# Altium PCB SPARKy watch PCB blank.PcbDoc (part 2 of 2)
Units mm, origin at the board's own origin, x right, y up, seen from the top; angles counter-clockwise.
Board outline 67 x 34.75 mm, 2 copper layers (Component Side, Bottom Layer), stack 0.325 mm thick; 94 components, 71 nets, 348 pads, 22 vias.
Unrouted connection lines stored in the file: 142.
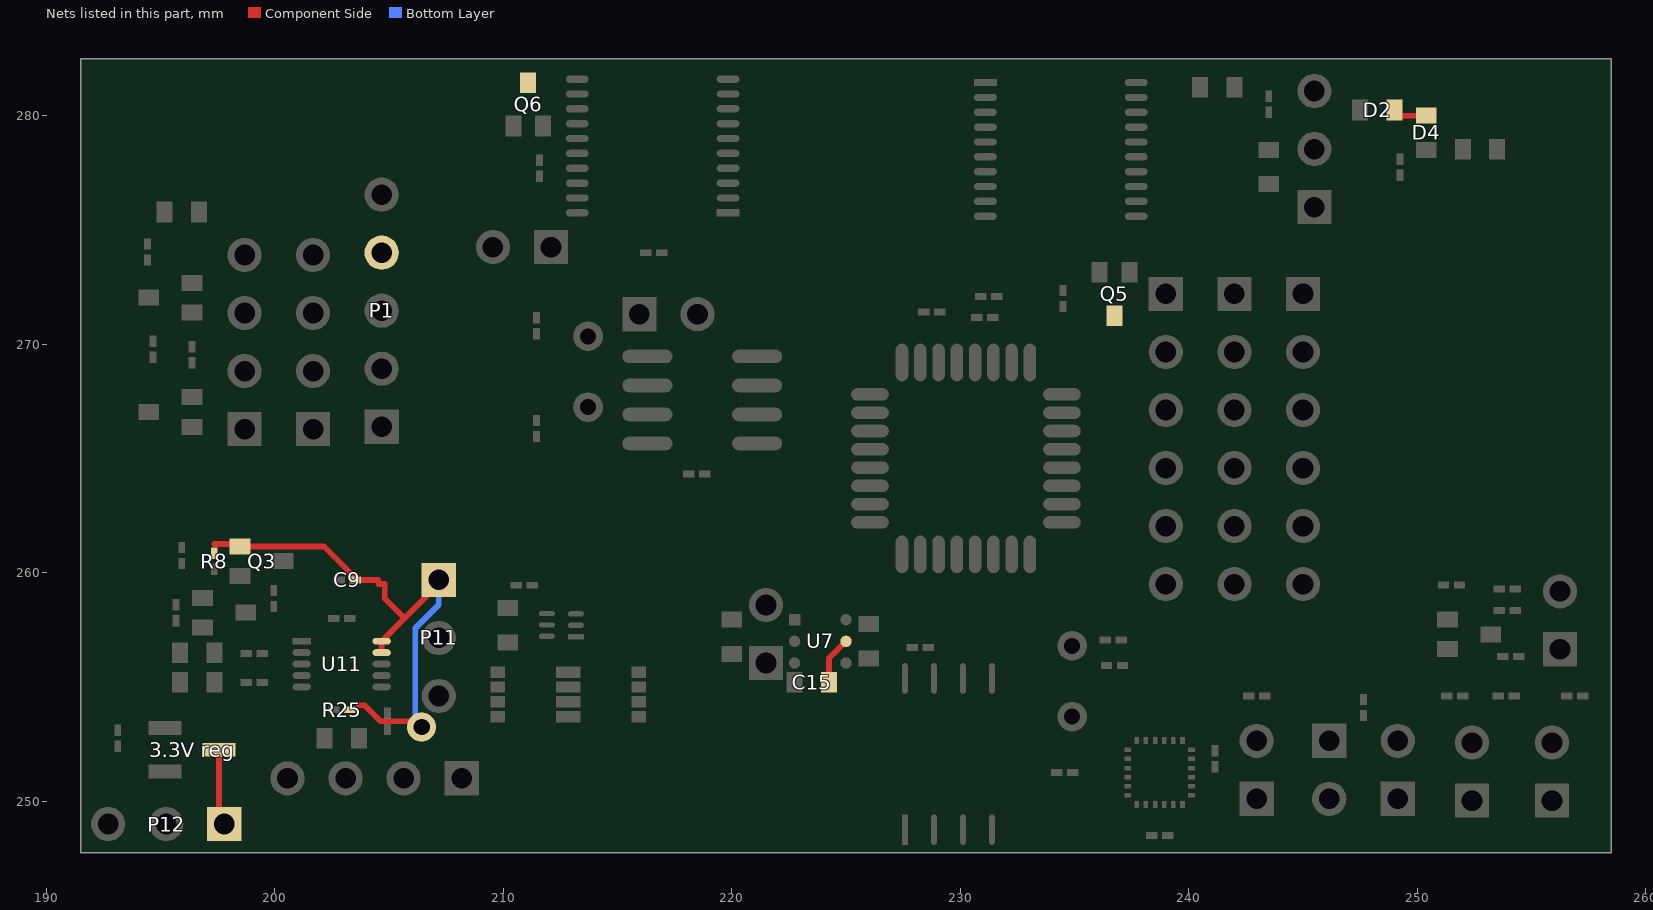
[diagram p2: the nets of this part, all layers, seen from the top]

## Via types
v1: diameter 1.27, hole 0.711, Component Side to Bottom Layer, 13 vias
v2: diameter 0.25, hole 0.2, Component Side to Bottom Layer, 9 vias

## Nets (pads, with @x,y where several pads share a name; then routed paths per layer and width w, separated by ;. In a path a pad name is that pad's centre, name@x,y a point inside that pad or via, vN(x,y) a via of type N, cw(c..) or ccw(c..) an arc to the next point about the centre after c; other vN are vias at no path point) (continued)
"V BAT": "3.3V reg.1" C9.2 C15.2 D2.2 D4.2 P1.4 P11.1 P12.1@197.787,249 Q3.1 Q5.3 Q6.3@211.089,281.45 R8.2 R25.1 U7.5 U11.9 U11.10 | length 31.3
  Component Side w0.254: 197.352,261.25 198.377,261.25 Q3.1@198.477,261.15 202.154,261.15 203.622,259.682 204.527,259.682 ; 197.552,252.25 197.552,249.235 P12.1@197.787,249 ; 203.677,254.196 203.931,254.196 204.627,253.5 206.177,253.5 v1(206.427,253.25) ; 204.527,259.5 204.809,259.5 204.809,258.868 205.677,258 ; U11.9@204.677,256.5 U11.10@204.677,257 205.677,258 ; P11.1@207.177,259.682 207.177,259.5 205.677,258 ; C15.2@224.25,255.196 224.25,256.246 U7.5@224.999,256.995 ; D2.2@249,280.25 249.25,280 D4.2@250.399,280
  Bottom Layer w0.254: v1(206.427,253.25) 206.427,253.298 206.15,253.575 206.15,257.568 207.177,258.595 P11.1@207.177,259.682
pads on no net: P10.2 P10.3 Q6.2@251.325,256.65 R100.1 U1.10 U1.23 U2.2 U2.3 U2.4 U2.5 U2.6 U2.7 U2.14 U2.15 U2.16 U2.17 U2.19 U2.21 U5.1 U5.3 U5.8 U5.10 U5.13 U5.18 U5.19 U6.3 U6.8 U6.15 U6.18 U8.1
copper on no net: | length 247.4
  Component Side w0.2: 174.75,302.793 175,303.043 175,320.75 177.75,320.75 ; 174.75,305.793 172,305.793 172,317.75 174.75,317.75 ; 175,325 175,317.75 177.75,317.75 177.75,320.75 ; 178,305.793 178,302.793 180.75,302.793 ; 183.75,305.793 183.75,302.793 ; 177.75,320.75 180.75,320.75 ; 180.75,302.793 180.75,320.75 ; 180.75,302.793 183.75,302.793 ; 180.75,302.793 180.75,320.75 ; 180.75,320.75 184,320.75 184,303.043 183.75,302.793
  Bottom Layer w0.2: 174.75,302.793 174.75,320.75 178,320.75 178,317.75 174.75,317.75 ; 174.75,305.793 172,305.793 172,317.75 174.75,317.75 ; 174.75,325 174.75,317.75 ; 177.75,320.75 180.75,320.75 ; 178,305.793 178,302.793 180.75,302.793 ; 183.75,305.793 183.75,302.793 ; 180.75,302.793 180.75,320.75 ; 180.75,302.793 183.75,302.793 ; 180.75,302.793 180.75,320.75 ; 180.75,320.75 184,320.75 184,303.043 183.75,302.793
  other v2: 238.225,250.733 238.725,250.733 239.325,250.733 238.225,251.233 238.725,251.233 239.325,251.233 238.225,251.733 238.725,251.733 239.325,251.733

## Keep-outs
Keep-Out Layer:
  lines w0.1: 171.75,306.043 171.75,317.5 184,317.5 184,306.043 171.75,306.043 ; 183.75,224.863 183.75,294.863 293.75,294.863 293.75,224.863 183.75,224.863

## Other copper
Component Side:
  text "100XXXX ISSUE 1" at 173.75,335.25 h2.5
  text "1" at 172.75,303.543 h2.5
  text "4" at 405.662,105.85 h3
  text "TOP ELEC" at 434.35,105.85 h3
Bottom Layer:
  text "4" at 181.75,303.5 h2.5
  text "11" at 404.384,105.85 h3
  text "BOTTOM ELEC" at 434.35,105.85 h3

## Silkscreen, mask and mechanical layers (free items; w line width, h text height)
Top Paste:
  text "2" at 405.662,105.85 h3
  text "TOP SOLDER PASTE" at 434.35,105.85 h3
Bottom Paste:
  text "13" at 404.384,105.85 h3
  text "BOTTOM SOLDER PASTE" at 434.35,105.85 h3
Top Solder:
  rectangle: 192.75,340.25 205.25,343.75
  text "3" at 405.662,105.85 h3
  text "TOP SOLDER RESIST" at 434.35,105.85 h3
Solder Side:
  rectangle: 177.25,343.5 189.75,347
  text "12" at 404.384,105.85 h3
  text "BOTTOM SOLDER RESIST" at 434.35,105.85 h3
Mechanical 5:
  drawing of 6820 lines, arcs and shapes, not listed
  text "1" at 138.126,384.5 h4
  text "2" at 186.222,384.5 h4
  text "3" at 234.722,384.5 h4
  text "4" at 283.222,384.5 h4
  text "5" at 331.722,384.5 h4
  text "6" at 380.222,384.5 h4
  text "7" at 428.722,384.5 h4
  text "8" at 477.222,384.5 h4
  text "DO NOT SCALE - IF IN DOUBT ASK" at 265.25,376.5 h6
  text "A" at 503.897,368.98 h4
  text "A" at 101.359,364.134 h4
  text "B" at 503.897,320.48 h4
  text "B" at 101.359,315.634 h4
  text "C" at 503.897,271.98 h4
  text "C" at 101.359,267.134 h4
  text "D" at 503.897,223.48 h4
  text "D" at 101.359,218.634 h4
  text "E" at 503.864,174.921 h4
  text "E" at 101.359,170.134 h4
  text "NO. OF LAYERS:" at 169.088,149.85 h3
  text "GENERAL NOTES" at 237.338,149.85 h3
  text "DR'N:" at 469.588,149.85 h3
  text "THE INFORMATION CONTAINED" at 111.338,148.6 h4.5
  text "PROJECTION" at 447.338,147.85 h3
  text "MATERIAL:" at 169.088,145.85 h3
  text "FR4 TO IPC4101/99 OR ABOVE WITH" at 184.838,145.85 h3
  text "1. THIS PCB SHALL BE MANUFACTURED IN ACCORDANCE WITH IPC-6012 CLASS 2." at 237.338,145.85 h3
  text "DATE:" at 469.588,145.85 h3
  text "HEREIN SHALL NOT BE REPRODUCED" at 106.088,143.85 h4.5
  text "A  FLIR  COMPANY" at 417.778,142.337 h3
  text "MINIMUM Tg RATING OF 170" at 184.838,141.85 h3
  text "2. MANUFACTURER LOGO AND UL MARK (94V-0) TO BE ADDED TO SOLDER RESIST ARTWORK IN AREA SHOWN." at 237.338,141.85 h3
  text "CK'D:" at 469.588,141.85 h3
  text "WITHOUT THE PRIOR" at 119.338,139.1 h4.5
  text "BOARD THICKNESS:" at 169.088,137.85 h3
  text "OVER PLATING" at 206.588,137.85 h3
  text "3. ALL PCB'S TO BE ELECTRICALY TESTED TO IPC-9252." at 237.338,137.85 h3
  text "DATE:" at 469.588,137.85 h3
  text "C" at 398.781,136.359 h4
  text "2014 RAYMARINE LTD" at 404.781,136.359 h4
  text "WRITTEN PERMISSION OF" at 116.338,134.6 h4.5
  text "SURFACE FINISH:" at 169.088,133.85 h3
  text "ENIG TO IPC-4552 CLASS 2" at 194.088,133.85 h3
  text "4. PCB NUMBER, ISSUE AND TITLE TO BE INCLUDED IN COPPER ON LAYER 1." at 237.338,133.85 h3
  text "TEXT TO BE IN UPPER CASE AND" at 340.588,133.85 h3
  text "APPR:" at 469.588,133.85 h3
  text "RAYMARINE LTD" at 123.338,130.1 h4.5
  text "SOLDER RESIST:" at 169.088,129.85 h3
  text "GREEN PHOTO IMAGEABLE TO" at 194.088,129.85 h3
  text "BETWEEN 1.5mm AND 4.0mm IN HEIGHT." at 240.588,129.85 h3
  text "DIMENSIONS IN MM" at 407.088,129.85 h3
  text "SCALE:" at 447.088,129.85 h3
  text "1:1" at 460.338,129.85 h3
  text "PROJECT:" at 469.588,129.85 h3
  text "F" at 101.359,127.798 h4
  text "TOLERANCES UNLESS OTHERWISE STATED" at 107.338,125.85 h3
  text "IPC-SM-840 CLASS T" at 194.088,125.85 h3
  text "5. PANEL WASTE AREA TO INCLUDE COPPER HATCHING." at 237.338,125.85 h3
  text "TITLE:" at 397.088,125.85 h3
  text "F" at 504.122,123.722 h4
  text "X" at 109.838,121.85 h3
  text "+/- 0.50" at 120.088,121.85 h3
  text "SHARP INTERNAL" at 139.588,121.85 h3
  text "MINIMUM TRACK WIDTH:" at 169.088,121.85 h3
  text "6. WHERE APPLICABLE IMPEDANCE TEST COUPONS SHALL BE SUPPLIED." at 237.338,121.85 h3
  text ".X" at 109.338,117.85 h3
  text "+/- 0.25" at 120.088,117.85 h3
  text "CORNERS TO HAVE" at 138.088,117.85 h3
  text "MINIMUM TRACK SPACING:" at 169.088,117.85 h3
  text "7. REFER TO PURCHASE ORDER FOR DEVIATIONS FROM THIS DRAWING." at 237.338,117.85 h3
  text "DRAWING No." at 397.088,116.1 h3
  text "REVISION:" at 449.588,116.1 h3
  text ".XX" at 109.338,113.85 h3
  text "+/- 0.10" at 120.088,113.85 h3
  text "HAVE RADIUS 0.80" at 139.088,113.85 h3
  text "CONTROLLED IMPEDANCE BUILD:" at 169.088,113.85 h3
  text "8. SOLDER MASK: NO BLOCKING OF PINS WITHOUT WRITTEN PERMISSION OF RAYMARINE" at 237.338,113.6 h3
  text "A" at 496.588,113.1 h8
  text ".XXX" at 109.338,109.85 h3
  text "+/- 0.05" at 120.088,109.85 h3
  text "MAX UNLESS" at 142.088,109.85 h3
  text "9. SURFACE MICROVIAS TO BE FILLED TO IPC SPECIFICATIONS" at 237.338,109.75 h3
  text "3" at 497.338,106.35 h8
  text "ANGLES   +/- 1" at 109.588,105.85 h3
  text "OTHERWISE STATED" at 137.338,105.85 h3
  text "SHT        OF" at 397.088,105.85 h3
  text "13" at 413.753,105.85 h3
  text "LAYER:" at 423.338,105.85 h3
  text "1" at 133.236,101.243 h4
  text "2" at 181.332,101.243 h4
  text "3" at 229.835,101.243 h4
  text "4" at 278.335,101.243 h4
  text "5" at 326.992,101.243 h4
  text "8" at 472.507,101.18 h4
  text "6" at 375.462,101.116 h4
  text "7" at 424.022,100.988 h4
Mechanical 6:
  drawing of 6830 lines, arcs and shapes, not listed
  text "1" at 138.126,682.607 h4
  text "2" at 186.222,682.607 h4
  text "3" at 234.722,682.607 h4
  text "4" at 283.222,682.607 h4
  text "5" at 331.722,682.607 h4
  text "6" at 380.222,682.607 h4
  text "7" at 428.722,682.607 h4
  text "8" at 477.222,682.607 h4
  text "DO NOT SCALE - IF IN DOUBT ASK" at 265.25,674.607 h6
  text "A" at 503.897,667.087 h4
  text "A" at 101.359,662.242 h4
  text "B" at 503.897,618.587 h4
  text "B" at 101.359,613.742 h4
  text "C" at 503.897,570.087 h4
  text "C" at 101.359,565.242 h4
  text "D" at 503.897,521.587 h4
  text "D" at 101.359,516.742 h4
  text "E" at 503.864,473.028 h4
  text "REV." at 397,470.957 h2
  text "REVISION DESCRIPTION" at 432.5,470.957 h2
  text "ECN/ECO" at 492.5,470.957 h2
  text "E" at 101.359,468.242 h4
  text "1" at 398.5,468.207 h2
  text "INITIAL DESIGN" at 403.162,468.207 h2
  text "E-XX-XXXX" at 491.915,468.207 h2
  text "GENERAL NOTES" at 169.088,447.957 h3
  text "DR'N:" at 469.588,447.957 h3
  text ".ASY_Drawn_By" at 478.088,447.955 h3
  text "THE INFORMATION CONTAINED" at 111.338,446.707 h4.5
  text "PROJECTION" at 447.338,445.957 h3
  text "1. THIS PCB SHALL BE ASSEMBLED IN ACCORDANCE WITH IPC-A-610 CLASS 2." at 169.088,443.957 h3
  text "DATE:" at 469.588,443.957 h3
  text ".ASY_Drawn_Date" at 478.088,443.951 h3
  text "HEREIN SHALL NOT BE REPRODUCED" at 106.088,441.957 h4.5
  text "A  FLIR  COMPANY" at 417.778,440.445 h3
  text "2. ALL ASPECTS OF THE MANUFACTURE OF THIS ASSEMBLY SHALL BE ROHS COMPLIANT." at 169.088,440.028 h3
  text "CK'D:" at 469.588,439.957 h3
  text ".ASY_Checked_By" at 478.088,439.957 h3
  text "WITHOUT THE PRIOR" at 119.338,437.207 h4.5
  text "DATE:" at 469.588,435.957 h3
  text ".ASY_Checked_Date" at 478.088,435.957 h3
  text "C" at 398.781,434.466 h4
  text "2014 RAYMARINE LTD" at 404.781,434.466 h4
  text "WRITTEN PERMISSION OF" at 116.338,432.707 h4.5
  text "APPR:" at 469.588,431.957 h3
  text "RAYMARINE LTD" at 123.338,428.207 h4.5
  text "DIMENSIONS IN MM" at 407.088,427.957 h3
  text "SCALE:" at 447.088,427.957 h3
  text "3:1" at 460.338,427.957 h3
  text "PROJECT:" at 469.588,427.957 h3
  text ".PCB_Project" at 484.588,427.957 h3
  text "F" at 101.359,425.905 h4
  text "TOLERANCES UNLESS OTHERWISE STATED" at 107.338,423.957 h3
  text "TITLE:" at 397.088,423.957 h3
  text ".PCB_Title" at 408.5,423.25 h4
  text "F" at 504.122,421.83 h4
  text "X" at 109.838,419.957 h3
  text "+/- 0.50" at 120.088,419.957 h3
  text "SHARP INTERNAL" at 139.588,419.957 h3
  text ".X" at 109.338,415.957 h3
  text "+/- 0.25" at 120.088,415.957 h3
  text "CORNERS TO HAVE" at 138.088,415.957 h3
  text "DRAWING No." at 397.088,414.207 h3
  text "REVISION:" at 449.588,414.207 h3
  text ".XX" at 109.338,411.957 h3
  text "+/- 0.10" at 120.088,411.957 h3
  text "HAVE RADIUS 0.80" at 139.088,411.957 h3
  text "A" at 496.588,411.207 h8
  text ".ASY_Number" at 397.088,408.207 h8
  text ".ASY_Revision" at 449.838,408.207 h8
  text ".XXX" at 109.338,407.957 h3
  text "+/- 0.05" at 120.088,407.957 h3
  text "MAX UNLESS" at 142.088,407.957 h3
  text "3" at 497.338,404.457 h8
  text "ANGLES   +/- 1" at 109.588,403.957 h3
  text "OTHERWISE STATED" at 137.338,403.957 h3
  text "SHT        OF" at 397.088,403.957 h3
  text "4" at 413.588,403.957 h3
  text "LAYER:" at 423.338,403.957 h3
  text "1" at 133.236,399.35 h4
  text "2" at 181.332,399.35 h4
  text "3" at 229.835,399.35 h4
  text "4" at 278.335,399.35 h4
  text "5" at 326.992,399.35 h4
  text "8" at 472.507,399.288 h4
  text "6" at 375.462,399.224 h4
  text "7" at 424.022,399.095 h4
Mechanical 7:
  drawing of 6830 lines, arcs and shapes, not listed
  text "8" at 130.166,682.607 h4
  text "7" at 178.667,682.607 h4
  text "6" at 227.167,682.607 h4
  text "5" at 275.667,682.607 h4
  text "4" at 324.167,682.607 h4
  text "3" at 372.667,682.607 h4
  text "2" at 421.167,682.607 h4
  text "1" at 469.263,682.607 h4
  text "DO NOT SCALE - IF IN DOUBT ASK" at 342.138,674.607 h6
  text "A" at 103.491,667.087 h4
  text "A" at 506.03,662.242 h4
  text "B" at 103.491,618.587 h4
  text "B" at 506.03,613.742 h4
  text "C" at 103.491,570.087 h4
  text "C" at 506.03,565.242 h4
  text "D" at 103.491,521.587 h4
  text "D" at 506.03,516.742 h4
  text "E" at 103.524,473.028 h4
  text "ECN/ECO" at 114.888,470.957 h2
  text "REVISION DESCRIPTION" at 174.888,470.957 h2
  text "REV." at 210.388,470.957 h2
  text "E" at 506.03,468.242 h4
  text "E-XX-XXXX" at 115.473,468.207 h2
  text "INITIAL DESIGN" at 204.227,468.207 h2
  text "1" at 208.888,468.207 h2
  text ".ASY_Drawn" at 129.3,447.955 h3
  text "DR'N:" at 137.8,447.957 h3
  text "GENERAL NOTES" at 438.3,447.957 h3
  text "THE INFORMATION CONTAINED" at 496.05,446.707 h4.5
  text "PROJECTION" at 160.05,445.957 h3
  text "DATE:" at 137.8,443.957 h3
  text "1. THIS PCB SHALL BE ASSEMBLED IN ACCORDANCE WITH IPC-A-610 CLASS 2." at 438.3,443.957 h3
  text ".ASY_Drawn_Date" at 129.3,443.951 h3
  text "HEREIN SHALL NOT BE REPRODUCED" at 501.3,441.957 h4.5
  text "A  FLIR  COMPANY" at 189.611,440.445 h3
  text "2. ALL ASPECTS OF THE MANUFACTURE OF THIS ASSEMBLY SHALL BE ROHS COMPLIANT." at 438.3,440.028 h3
  text ".ASY_Checked" at 129.3,439.957 h3
  text "CK'D:" at 137.8,439.957 h3
  text "WITHOUT THE PRIOR" at 488.05,437.207 h4.5
  text ".ASY_Checked_Date" at 129.3,435.957 h3
  text "DATE:" at 137.8,435.957 h3
  text "2014 RAYMARINE LTD" at 202.608,434.466 h4
  text "C" at 208.608,434.466 h4
  text "WRITTEN PERMISSION OF" at 491.05,432.707 h4.5
  text "APPR:" at 137.8,431.957 h3
  text "RAYMARINE LTD" at 484.05,428.207 h4.5
  text ".PCB_Project" at 122.8,427.957 h3
  text "PROJECT:" at 137.8,427.957 h3
  text "1:1" at 147.05,427.957 h3
  text "SCALE:" at 160.3,427.957 h3
  text "DIMENSIONS IN MM" at 200.3,427.957 h3
  text "F" at 506.03,425.905 h4
  text "TITLE:" at 210.3,423.957 h3
  text "TOLERANCES UNLESS OTHERWISE STATED" at 500.05,423.957 h3
  text ".PCB_Title" at 201.25,423.25 h4
  text "F" at 103.266,421.83 h4
  text "SHARP INTERNAL" at 467.8,419.957 h3
  text "+/- 0.50" at 487.3,419.957 h3
  text "X" at 497.55,419.957 h3
  text "CORNERS TO HAVE" at 469.3,415.957 h3
  text "+/- 0.25" at 487.3,415.957 h3
  text ".X" at 498.05,415.957 h3
  text "REVISION:" at 157.8,414.207 h3
  text "DRAWING No." at 210.3,414.207 h3
  text "HAVE RADIUS 0.80" at 468.3,411.957 h3
  text "+/- 0.10" at 487.3,411.957 h3
  text ".XX" at 498.05,411.957 h3
  text "A" at 110.8,411.207 h8
  text ".ASY_Revision" at 157.55,408.207 h8
  text ".ASY_Number" at 210.3,408.207 h8
  text "MAX UNLESS" at 465.3,407.957 h3
  text "+/- 0.05" at 487.3,407.957 h3
  text ".XXX" at 498.05,407.957 h3
  text "3" at 110.05,404.457 h8
  text "LAYER:" at 184.05,403.957 h3
  text "4" at 193.8,403.957 h3
  text "SHT        OF" at 210.3,403.957 h3
  text "OTHERWISE STATED" at 470.05,403.957 h3
  text "ANGLES   +/- 1" at 497.8,403.957 h3
  text "5" at 280.396,399.35 h4
  text "4" at 329.053,399.35 h4
  text "3" at 377.553,399.35 h4
  text "2" at 426.057,399.35 h4
  text "1" at 474.152,399.35 h4
  text "8" at 134.881,399.288 h4
  text "6" at 231.926,399.224 h4
  text "7" at 183.366,399.095 h4
Mechanical 10:
  lines w0.1: 183.75,224.863 293.75,224.863 293.75,294.863 183.75,294.863 183.75,224.863
Mechanical 13:
  text "TOP ASSEMBLY" at 440.5,419 h2.5
  text "1" at 405.338,403.957 h3
Mechanical 14:
  text "TOP ASSEMBLY CONVENTIONAL" at 434,419 h2.5
  text "2" at 405.75,403.957 h3
Drill Drawing:
  drawing of 296 lines, arcs and shapes, not listed
  text "SEE NOTE 2" at 180.25,505.75 h4
  text "CONTROLLED IMPEDANCE REQUIREMENTS" at 118.85,380.507 h2.5
  text "Layer" at 366.926,379.507 h2.5
  text "Name" at 377.646,379.507 h2.5
  text "Material" at 403.742,379.507 h2.5
  text "Thickness" at 425.95,379.507 h2.5
  text "Constant" at 441.145,379.507 h2.5
  text "Board Layer Stack" at 455.226,379.507 h2.5
  text "Filename" at 484.038,379.507 h2.5
  text "TRACK" at 107.85,376.757 h2.5
  text "REFERENCE" at 119.85,376.757 h2.5
  text "TRACK" at 155.85,376.757 h2.5
  text "TRACK" at 169.1,376.757 h2.5
  text "IMPEDANCE" at 137.85,375.507 h2.5
  text "1" at 366.926,374.507 h2.5
  text "Top Silk" at 377.646,374.507 h2.5
  text ".PCB_Number" at 478.038,374.507 h2.5
  text "-" at 486.708,374.507 h2.5
  text ".PCB_Revision" at 487.538,374.507 h2.5
  text ".GTO" at 488.588,374.507 h2.5
  text "LAYER" at 108.1,374.257 h2.5
  text "LAYER/S" at 121.85,374.257 h2.5
  text "WIDTH" at 156.1,374.257 h2.5
  text "SPACING" at 168.1,374.257 h2.5
  text "TOP ELEC" at 106.35,370.507 h2.5
  text "INNER X" at 122.1,370.507 h2.5
  text "50 OHM SE" at 138.35,370.507 h2.5
  text "XXXum" at 156.35,370.507 h2.5
  text "N/A" at 171.1,370.507 h2.5
  text "2" at 366.926,369.507 h2.5
  text "Top Solder Resist" at 377.646,369.507 h2.5
  text "Solder Resist" at 403.742,369.507 h2.5
  text "0.010mm" at 425.95,369.507 h2.5
  text "3.5" at 441.145,369.507 h2.5
  text ".PCB_Number" at 478.038,369.507 h2.5
  text "-" at 486.708,369.507 h2.5
  text ".PCB_Revision" at 487.538,369.507 h2.5
  text ".GTS" at 488.588,369.507 h2.5
  text "INNER X" at 107.35,366.757 h2.5
  text "INNER X" at 122.1,366.757 h2.5
  text "100 OHM DIFF" at 137.1,366.757 h2.5
  text "XXXum" at 156.35,366.757 h2.5
  text "XXXum" at 169.6,366.757 h2.5
  text "3" at 366.926,364.507 h2.5
  text "Top Elec" at 377.646,364.507 h2.5
  text "Copper" at 403.742,364.507 h2.5
  text "0.035mm" at 425.95,364.507 h2.5
  text ".PCB_Number" at 478.038,364.507 h2.5
  text "-" at 486.708,364.507 h2.5
  text ".PCB_Revision" at 487.538,364.507 h2.5
  text ".GTL" at 488.588,364.507 h2.5
  text "INNER X" at 107.35,363.007 h2.5
  text "INNER X" at 122.1,363.007 h2.5
  text "90 OHM DIFF" at 137.85,363.007 h2.5
  text "XXXum" at 156.35,363.007 h2.5
  text "XXXum" at 169.6,363.007 h2.5
  text "4" at 366.926,359.507 h2.5
  text "Dielectric 1" at 377.646,359.507 h2.5
  text "Shengyi S1000-2" at 403.742,359.507 h2.5
  text "0.140mm" at 425.95,359.507 h2.5
  text "4.2" at 441.145,359.507 h2.5
  text "BOT ELEC" at 106.35,359.257 h2.5
  text "INNER X" at 122.1,359.257 h2.5
  text "50 OHM SE" at 138.6,359.257 h2.5
  text "XXXum" at 156.35,359.257 h2.5
  text "N/A" at 171.1,359.257 h2.5
  text "5" at 366.926,354.507 h2.5
  text "Layer 2" at 377.646,354.507 h2.5
  text "Copper" at 403.742,354.507 h2.5
  text "0.017mm" at 425.95,354.507 h2.5
  text ".PCB_Number" at 478.038,354.507 h2.5
  text "-" at 486.708,354.507 h2.5
  text ".PCB_Revision" at 487.538,354.507 h2.5
  text ".G1" at 488.588,354.507 h2.5
  text "6" at 366.926,349.507 h2.5
  text "Dielectric 2" at 377.646,349.507 h2.5
  text "1.200mm" at 425.95,349.507 h2.5
  text "4.2" at 441.145,349.507 h2.5
  text "7" at 366.926,344.507 h2.5
  text "Layer 3" at 377.646,344.507 h2.5
  text "Copper" at 403.742,344.507 h2.5
  text "0.017mm" at 425.95,344.507 h2.5
  text ".PCB_Number" at 478.038,344.507 h2.5
  text "-" at 486.708,344.507 h2.5
  text ".PCB_Revision" at 487.538,344.507 h2.5
  text ".G2" at 488.588,344.507 h2.5
  text "8" at 366.926,339.507 h2.5
  text "Dielectric 3" at 377.646,339.507 h2.5
  text "Shengyi S1000-2" at 403.742,339.507 h2.5
  text "0.140mm" at 425.95,339.507 h2.5
  text "4.2" at 441.145,339.507 h2.5
  text "9" at 366.926,334.507 h2.5
  text "Bottom Elec" at 377.646,334.507 h2.5
  text "Copper" at 403.742,334.507 h2.5
  text "0.035mm" at 425.95,334.507 h2.5
  text ".PCB_Number" at 478.038,334.515 h2.5
  text "-" at 486.708,334.515 h2.5
  text ".PCB_Revision" at 487.538,334.515 h2.5
  text ".GBL" at 488.588,334.515 h2.5
  text "10" at 366.926,329.507 h2.5
  text "Bottom Solder Resist" at 377.646,329.507 h2.5
  text "Solder Resist" at 403.742,329.507 h2.5
  text "0.010mm" at 425.95,329.507 h2.5
  text "3.5" at 441.145,329.507 h2.5
  text ".PCB_Number" at 478.038,329.507 h2.5
  text "-" at 486.708,329.507 h2.5
  text ".PCB_Revision" at 487.538,329.507 h2.5
  text ".GBS" at 488.588,329.507 h2.5
  text "11" at 366.926,324.507 h2.5
  text "Bottom Silk" at 377.646,324.507 h2.5
  text ".PCB_Number" at 478,324.507 h2.5
  text "-" at 486.67,324.507 h2.5
  text ".PCB_Revision" at 487.5,324.507 h2.5
  text ".GBO" at 488.55,324.507 h2.5
  text "ADDITIONAL DATA" at 415.25,266.5 h4
  text "FABRICATION DRAWING (THIS DRAWING)" at 366.322,259.5 h2.5
  text ".PCB_Number" at 478.038,259.507 h2.5
  text "-" at 486.708,259.5 h2.5
  text ".PCB_Revision" at 487.538,259.5 h2.5
  text ".GD1" at 488.588,259.507 h2.5
  text "PLATING DRILL FILE" at 366.322,254.5 h2.5
  text ".PCB_Number" at 478.038,254.507 h2.5
  text "-" at 486.708,254.507 h2.5
  text ".PCB_Revision" at 487.538,254.507 h2.5
  text ".TXT" at 488.588,254.507 h2.5
  text "NON PLATED DRILL FILE" at 366.322,249.5 h2.5
  text ".PCB_Number" at 478.038,249.507 h2.5
  text "-" at 486.708,249.507 h2.5
  text ".PCB_Revision" at 487.538,249.507 h2.5
  text ".DRR" at 488.588,249.515 h2.5
  text ".IPC" at 488.588,244.515 h2.5
  text "IPC-D-356 NETLIST" at 366.322,244.5 h2.5
  text ".PCB_Number" at 478.038,244.507 h2.5
  text "-" at 486.708,244.5 h2.5
  text ".PCB_Revision" at 487.538,244.5 h2.5
  text "_FAB.ZIP" at 488.588,239.515 h2.5
  text "FABRICATION DATA ZIP FILE" at 366.322,239.5 h2.5
  text ".PCB_Number" at 478.038,239.507 h2.5
  text "-" at 486.708,239.507 h2.5
  text ".PCB_Revision" at 487.538,239.507 h2.5
  text ".PCB_Number" at 477.788,234.5 h2.5
  text "-" at 486.458,234.5 h2.5
  text ".PCB_Revision" at 487.288,234.5 h2.5
  text ".GTP" at 488.338,234.5 h2.5
  text "TOP PASTE" at 366.246,234.243 h2.5
  text ".PCB_Number" at 477.996,229.25 h2.5
  text "-" at 486.666,229.25 h2.5
  text ".PCB_Revision" at 487.496,229.25 h2.5
  text ".GBP" at 488.546,229.25 h2.5
  text "BOTTOM PASTE" at 366.246,229.015 h2.5
  text "Symbol" at 108.214,176.309 h3.6
  text "Qty" at 122.212,176.309 h3.6
  text "Finished Hole Size" at 135.24,176.309 h3.6
  text "Plated" at 165.346,176.309 h3.6
  text "Hole Type" at 177.622,176.309 h3.6
  text "Tolerance" at 195.54,176.309 h3.6
  text "REV." at 397,172.85 h2
  text "REVISION DESCRIPTION" at 432.5,172.85 h2
  text "ECN/ECO" at 492.5,172.85 h2
  text "9" at 122.212,170.703 h3
  text "0.20mm" at 135.24,170.703 h3
  text "PTH" at 165.346,170.703 h3
  text "Round" at 177.622,170.703 h3
  text "1" at 398.5,170.1 h2
  text "INITIAL DESIGN" at 403.162,170.1 h2
  text "E-XX-XXXX" at 491.915,170.1 h2
  text "4" at 122.212,165.097 h3
  text "0.70mm" at 135.24,165.097 h3
  text "PTH" at 165.346,165.097 h3
  text "Round" at 177.622,165.097 h3
  text "13" at 122.212,159.49 h3
  text "0.71mm" at 135.24,159.49 h3
  text "PTH" at 165.346,159.49 h3
  text "Round" at 177.622,159.49 h3
  text "62" at 122.212,153.884 h3
  text "0.90mm" at 135.24,153.884 h3
  text "PTH" at 165.346,153.884 h3
  text "Round" at 177.622,153.884 h3
  text ".PCB_Electrical_Layer_Qty." at 192.088,149.85 h3
  text ".PCB_Drawn_By" at 478.588,149.85 h3
  text "88 Total" at 122.212,148.278 h3
  text ".PCB_Drawn_Date" at 478.588,145.85 h3
  text ".PCB_Checked_By" at 478.588,141.85 h3
  text ".PCB_Board_Thickness" at 196.588,137.85 h3
  text ".PCB_Checked_Date" at 478.588,137.85 h3
  text ".PCB_Project" at 484.588,129.85 h3
  text ".PCB_Min_Track" at 203.838,121.85 h3
  text ".PCB_Title" at 397.088,120.6 h5
  text ".PCB_Min_Space" at 206.338,117.85 h3
  text ".PCB_Controlled_Impedance_Build" at 215.338,113.85 h3
  text ".PCB_Number" at 397.088,110.1 h8
  text ".PCB_Revision" at 449.838,110.1 h8
  text "1" at 405.662,105.85 h3
  text "FABRICATION DRAWING" at 434.35,105.85 h3
Mechanical 18:
  lines w0.2: 512.238,346.19 549.068,346.19 ; 512.238,350 549.068,350 ; 512.238,353.81 549.068,353.81 ; 512.238,357.62 549.068,357.62 ; 512.238,361.43 549.068,361.43 ; 512.238,365.24 549.068,365.24 ; 512.238,369.05 549.068,369.05 ; 512.238,372.86 549.068,372.86 ; 512.238,376.67 549.068,376.67 ; 512.238,380.48 549.068,380.48 ; 512.238,384.29 684.323,384.29 ; 521.128,342.38 521.128,384.29 ; 534.463,342.38 534.463,384.29 ; 549.068,228.08 684.323,228.08 ; 549.068,231.89 684.323,231.89 ; 549.068,334.76 549.068,388.1 ; 571.293,224.27 571.293,231.89 ; 512.238,342.38 549.068,342.38 549.068,224.27 684.323,224.27 684.323,388.1 512.238,388.1 512.238,342.38
  text "HISTORY" at 513.508,385.5 h2.5
  text "DESIGN COMMENTS" at 550.338,385.25 h2.5
  text "ISSUE" at 513.5,381.5 h2.5
  text "DESIGNER" at 522.25,381.5 h2.5
  text "DATE" at 538.75,381.5 h2.5
  text "IDF FILENAME" at 550.338,228.715 h1.42
  text "SCHEMATIC FILE" at 550.338,224.905 h1.42
Mechanical 23:
  text "BOTTOM ASSEMBLY" at 168.5,419 h2.5
  text "3" at 202.6,403.957 h3
Mechanical 24:
  text "BOTTOM ASSEMBLY CONVENTIONAL" at 177.75,419 h2.5
  text "4" at 202.05,403.957 h3